# Altium PCB 涂鸦幻彩灯带.PcbDoc_2021-06-10.pcbdoc
Units mil, origin at the board's own origin, x right, y up, seen from the top; angles counter-clockwise.
Board outline 3727 x 3111 mil, 2 copper layers (Top Layer, Bottom Layer); 36 components, 33 nets, 141 pads, 136 vias.
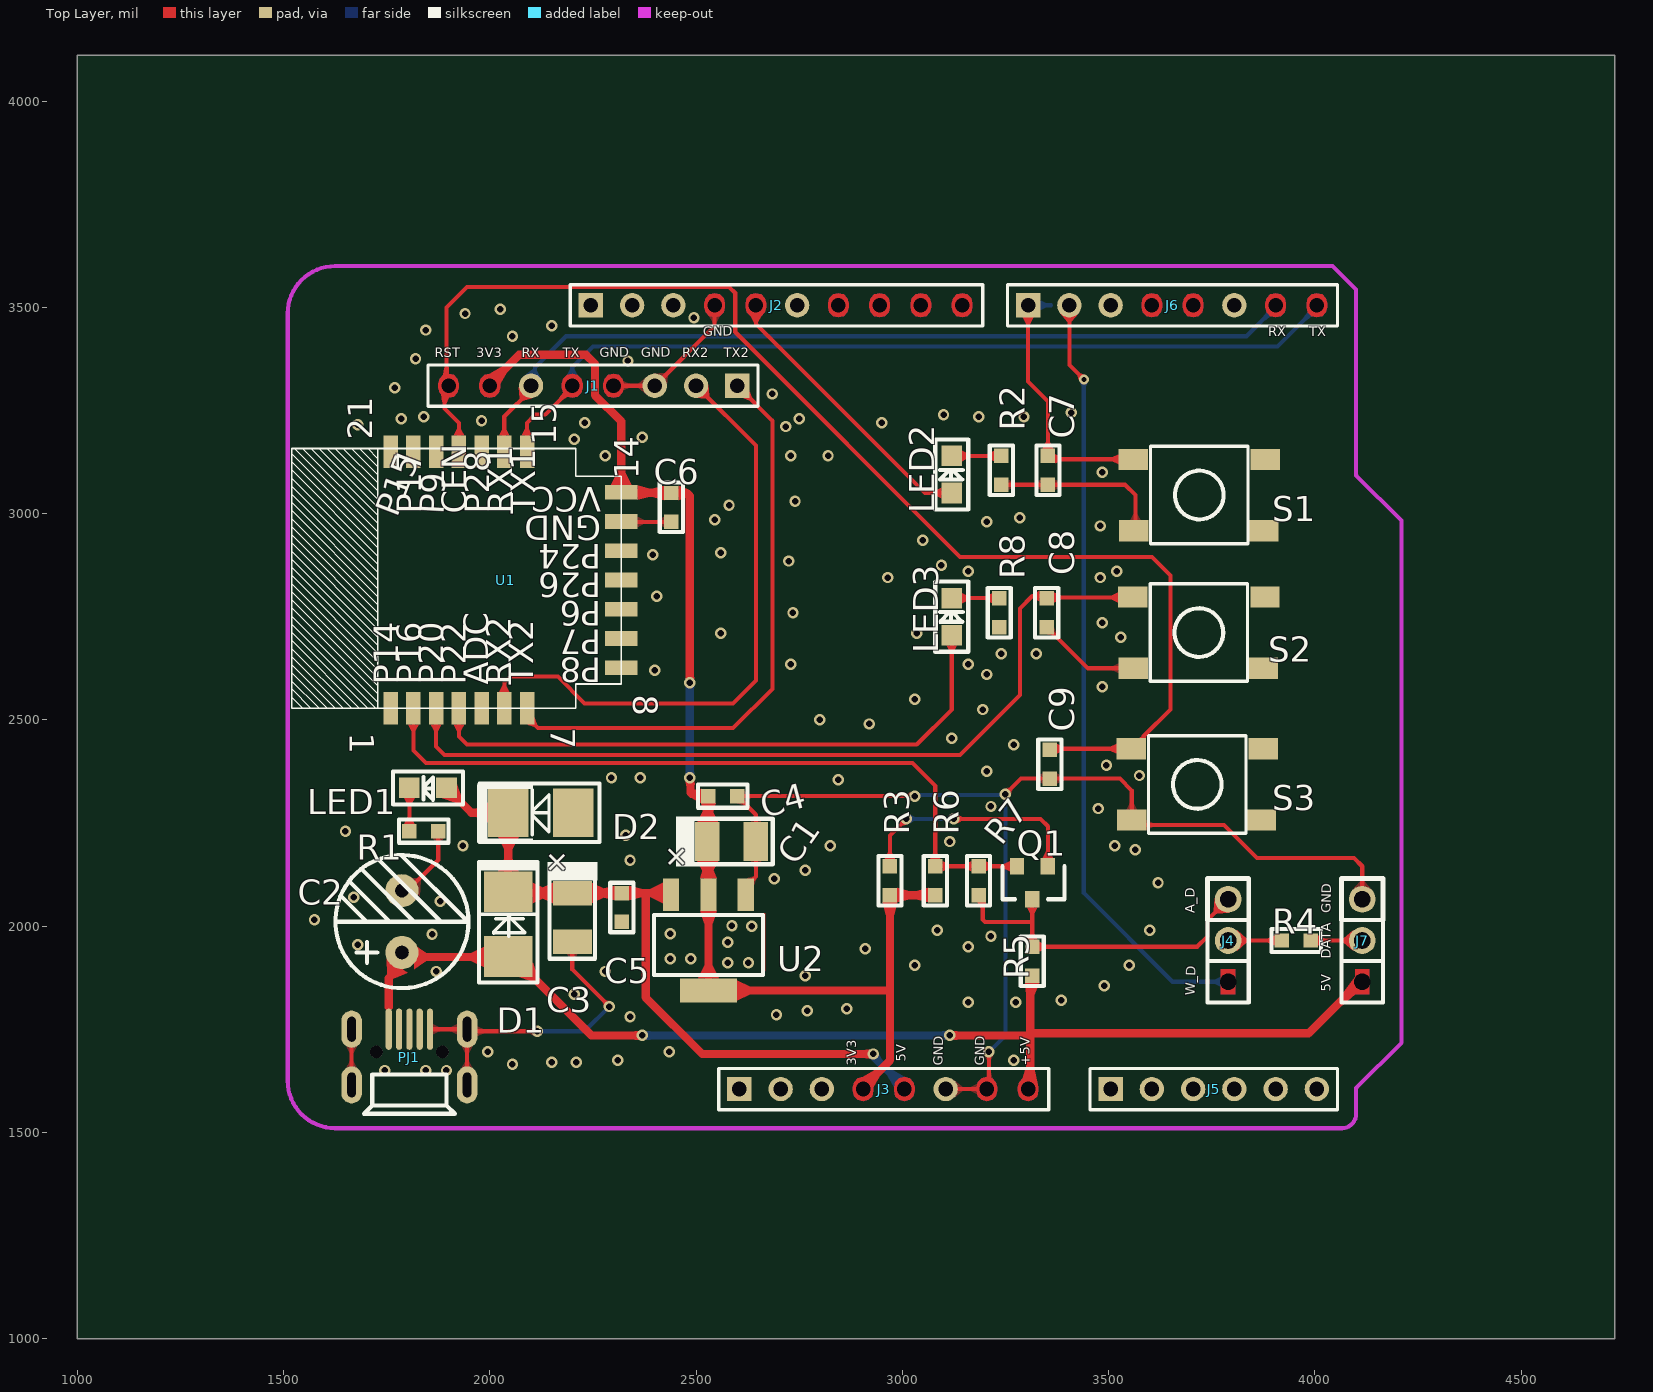
[diagram p0: Top Layer view]
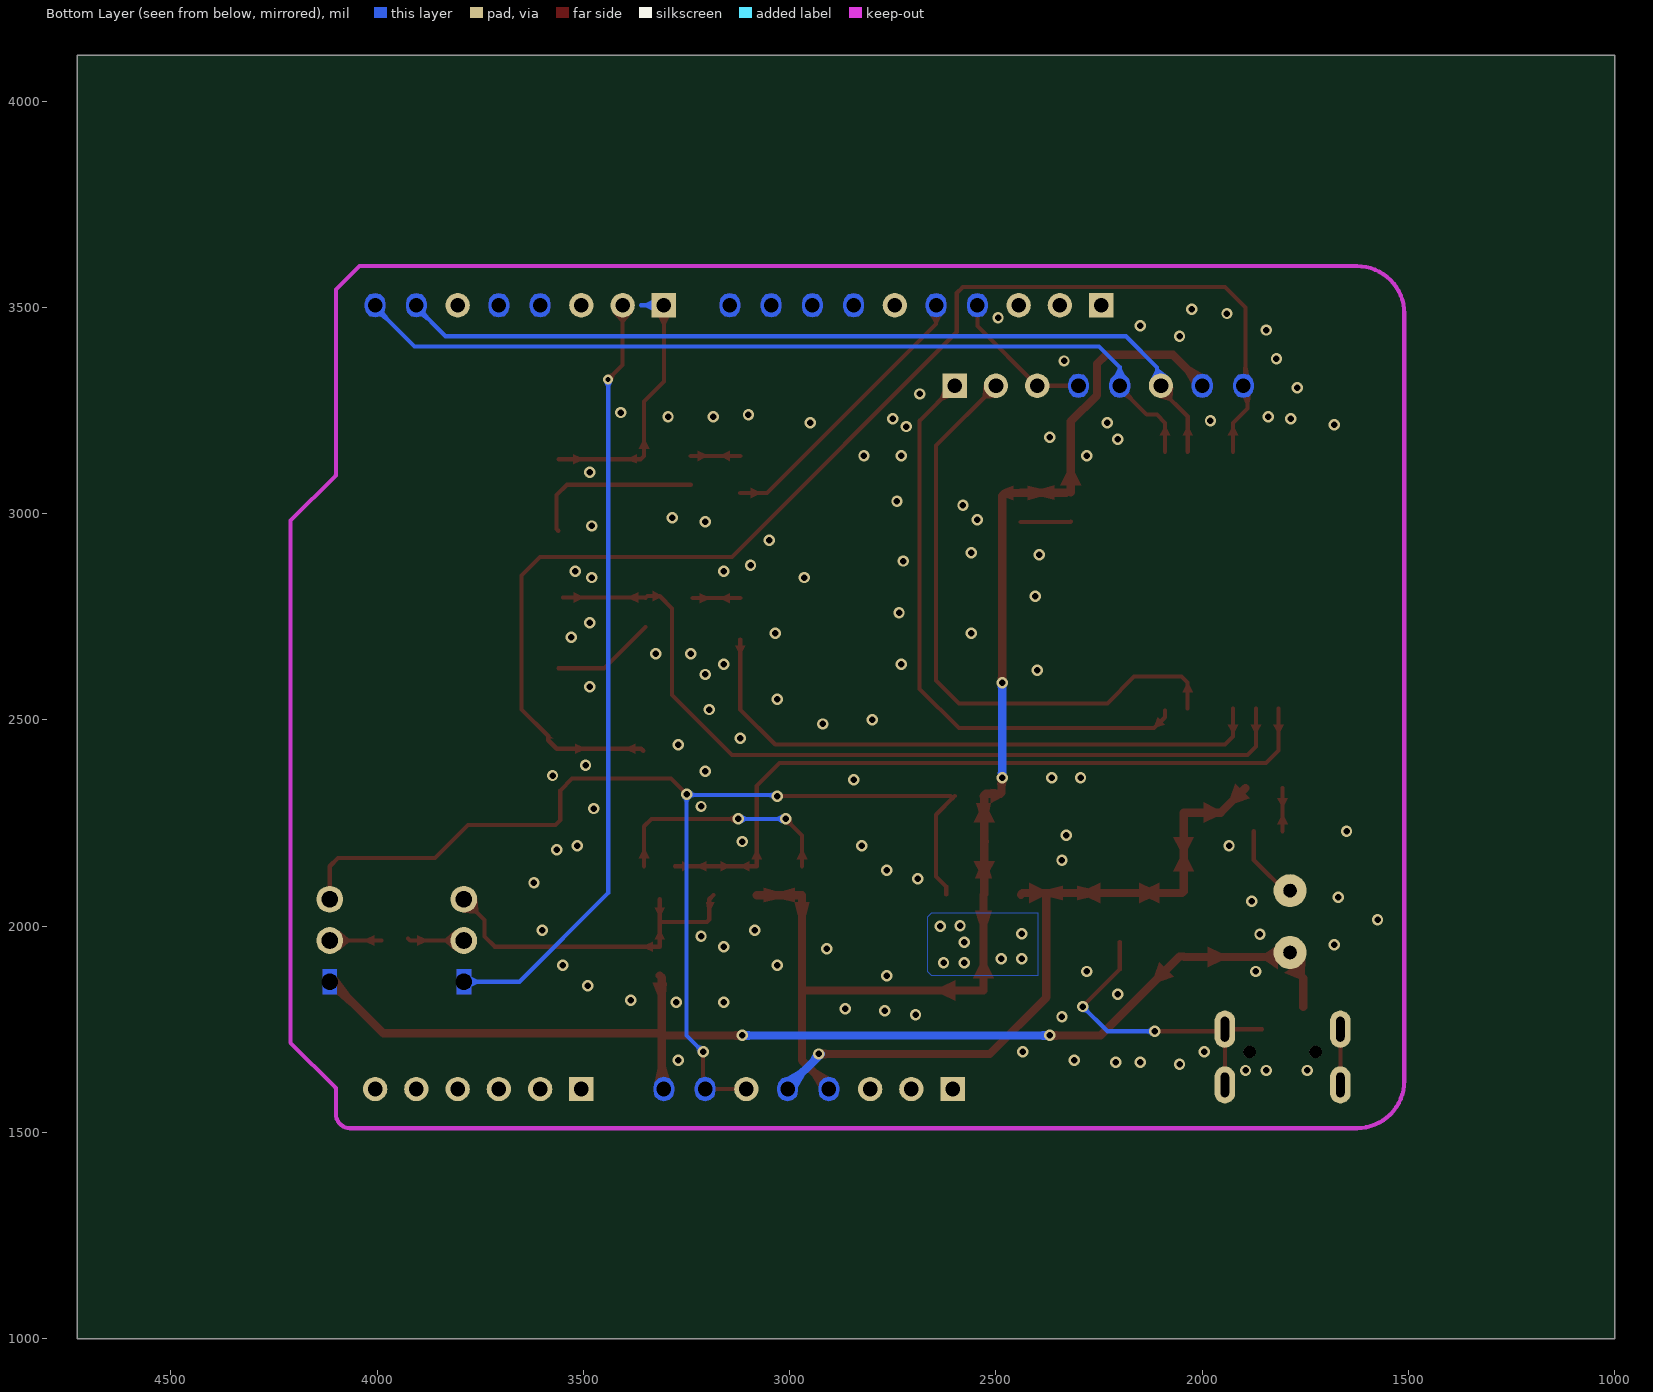
[diagram p1: Bottom Layer view, seen from below]

## Layer stack, top to bottom
Top Layer: signal copper (thickness not stored)
Dielectric: dielectric 12.6, FR-4, Dk 4.8
Bottom Layer: signal copper (thickness not stored)

## Board outline
4727,1000 1000,1000 1000,4111 4727,4111

## Components (designator, comment, footprint, x,y, rotation, side; value= is the part's Value field where it differs from the comment)
C1 "22uF±20%/16V" _____B3528 2585.95,2205 r0 top
C2 "220uF±20%/16V" CD0.15 1787,2011 r90 top
C3 "22uF±20%/16V" _____B3528 2200,2020.94 r270 top
C4 "0.1uF±20%/50V" C0603 2530,2315 r0 top
C5 "0.1uF±20%/50V" C0603 2320,2080 r270 top
C6 "0.1uF±20%/16V" C0603 2440,2980 r90 top
C7 "0.1uF±20%/16V" C0603 3353,3140 r270 top
C8 "0.1uF±20%/16V" C0603 3350,2725 r90 top
C9 "0.1uF±20%/16V" C0603 3357.5,2357.5 r90 top
D1 "SS210" SMA(DO-214AC) 2045,2005 r90 top
D2 "SMBJ05CA" SMB(DO-214AA) 2123.74,2275 r180 top
J1 "CON8" HDR1X8Z 2600,3310 r180 top
J2 "CON10" HDR1X10Z 2245,3505 r0 top
J3 "CON8" HDR1X8Z 2605,1605 r0 top
J4 "KF301-3P" "SIP3 - 2.54" 3790,1865 r90 top
J5 "CON6" HDR1X6Z 3505,1605 r0 top
J6 "CON8" HDR1X8Z 3305,3505 r0 top
J7 "KF301-3P" "SIP3 - 2.54" 4115,1865 r90 top
LED1 "LED" LED0805_1 1895,2335 r180 top
LED2 "LED" LED0805_1 3120,3050 r90 top
LED3 "LED" LED0805_1 3120,2705 r90 top
PJ1 "MCR_USB" MICRO_USB-NEW-16.12.12 1805,1682.5 r180 top
Q1 "S8050" SOT-23-NPN 3353,2145 r180 top
R1 "1R±5%" R0603 1805,2230 r0 top
R2 "1K±5%" R0603 3240,3070 r90 top
R3 "2K±5%" R0603 2970,2075 r90 top
R4 "1R±5%" R0603 3920,1965 r0 top
R5 "2K±5%" R0603 3315,1880 r90 top
R6 "2K±5%" R0603 3080,2075 r90 top
R7 "NC/0R" R0603 3185,2145 r270 top
R8 "1K±5%" R0603 3235,2795 r270 top
S1 "KEY_SW2" KEY4-SMD 3720,3045 r0 top
S2 "KEY_SW2" KEY4-SMD 3718.9,2711.61 r0 top
S3 "KEY_SW2" KEY4-SMD 3714.96,2343.39 r0 top
U1 "WIFI_BLE_CBU" WIFI_BLE_CBU 2318.7,2838.98 r90 top
U2 "GM1117-3.3ST3T" SOT-223 2530,1960 r180 top

## Footprints (in the part's own frame and the unit in brackets; to place one, negate y for a bottom-side part, rotate by r counter-clockwise, add the part's x,y. Pads: shape width x height; smd on the part's side, far side on the other; paste and mask are expansions set on the pad)
_____B3528 [mm]
  rect 1.5x2.4 smd: 1(-1.5,0) 2(1.5,0)
  silkscreen extent -3.4,-1.52 2.54,1.52
C0603 [mil]
  rect 35x35 smd: 1(0,0) 2(70,0)
  silkscreen extent -25,-28 95,28
CD0.15 [mil]
  round 80 hole 32 slot 32.2 at 0 deg: 1(-75,0) 2(75,0)
  silkscreen extent -161,-161 161,161
HDR1X6Z [mm]
  rect 1.5x1.5 hole 0.9: 1(0,0)
  round 1.5 hole 0.9: 2(2.54,0) 3(5.08,0) 4(7.62,0) 5(10.16,0) 6(12.7,0)
  silkscreen extent -1.27,-1.27 13.97,1.27
HDR1X8Z [mm]
  rect 1.5x1.5 hole 0.9: 1(0,0)
  round 1.5 hole 0.9: 2(2.54,0) 3(5.08,0) 6(12.7,0)
  round 0 hole 0.9: 4(7.62,0) 5(10.16,0) 7(15.24,0) 8(17.78,0)
  Top Layer region: 18.415,-0.115 18.33,-0.433 18.097,-0.665 17.78,-0.75 17.462,-0.665 17.23,-0.433 17.145,-0.115 17.145,0.115 17.23,0.432 17.462,0.665 17.78,0.75 18.097,0.665 18.33,0.432 18.415,0.115
  Top Layer region: 15.875,-0.115 15.79,-0.433 15.557,-0.665 15.24,-0.75 14.922,-0.665 14.69,-0.433 14.605,-0.115 14.605,0.115 14.69,0.432 14.922,0.665 15.24,0.75 15.557,0.665 15.79,0.432 15.875,0.115
  Top Layer region: 10.795,-0.115 10.71,-0.433 10.477,-0.665 10.16,-0.75 9.842,-0.665 9.61,-0.433 9.525,-0.115 9.525,0.115 9.61,0.432 9.842,0.665 10.16,0.75 10.477,0.665 10.71,0.432 10.795,0.115
  Top Layer region: 8.255,-0.115 8.17,-0.433 7.937,-0.665 7.62,-0.75 7.302,-0.665 7.07,-0.433 6.985,-0.115 6.985,0.115 7.07,0.432 7.302,0.665 7.62,0.75 7.937,0.665 8.17,0.432 8.255,0.115
  Bottom Layer region: 18.415,-0.115 18.33,-0.433 18.097,-0.665 17.78,-0.75 17.462,-0.665 17.23,-0.433 17.145,-0.115 17.145,0.115 17.23,0.432 17.462,0.665 17.78,0.75 18.097,0.665 18.33,0.432 18.415,0.115
  Bottom Layer region: 15.875,-0.115 15.79,-0.433 15.557,-0.665 15.24,-0.75 14.922,-0.665 14.69,-0.433 14.605,-0.115 14.605,0.115 14.69,0.432 14.922,0.665 15.24,0.75 15.557,0.665 15.79,0.432 15.875,0.115
  Bottom Layer region: 10.795,-0.115 10.71,-0.433 10.477,-0.665 10.16,-0.75 9.842,-0.665 9.61,-0.433 9.525,-0.115 9.525,0.115 9.61,0.432 9.842,0.665 10.16,0.75 10.477,0.665 10.71,0.432 10.795,0.115
  Bottom Layer region: 8.255,-0.115 8.17,-0.433 7.937,-0.665 7.62,-0.75 7.302,-0.665 7.07,-0.433 6.985,-0.115 6.985,0.115 7.07,0.432 7.302,0.665 7.62,0.75 7.937,0.665 8.17,0.432 8.255,0.115
  silkscreen extent -1.27,-1.27 19.05,1.27
HDR1X10Z [mil]
  rect 59.05x59.05 hole 35.43: 1(0,0)
  round 59.05 hole 35.43: 2(100,0) 3(200,0) 6(500,0)
  round 0 hole 35.43: 4(300,0) 5(400,0) 7(600,0) 8(700,0) 9(800,0) 10(900,0)
  Top Layer region: 825,-4.53 821.65,-17.03 812.5,-26.18 800,-29.53 787.5,-26.18 778.35,-17.03 775,-4.53 775,4.53 778.35,17.03 787.5,26.18 800,29.53 812.5,26.18 821.65,17.03 825,4.53
  Top Layer region: 925,-4.53 921.65,-17.03 912.5,-26.18 900,-29.53 887.5,-26.18 878.35,-17.03 875,-4.53 875,4.53 878.35,17.03 887.5,26.18 900,29.53 912.5,26.18 921.65,17.03 925,4.53
  Top Layer region: 725,-4.53 721.65,-17.03 712.5,-26.18 700,-29.53 687.5,-26.18 678.35,-17.03 675,-4.53 675,4.53 678.35,17.03 687.5,26.18 700,29.53 712.5,26.18 721.65,17.03 725,4.53
  Top Layer region: 625,-4.53 621.65,-17.03 612.5,-26.18 600,-29.53 587.5,-26.18 578.35,-17.03 575,-4.53 575,4.53 578.35,17.03 587.5,26.18 600,29.53 612.5,26.18 621.65,17.03 625,4.53
  Top Layer region: 425,-4.53 421.65,-17.03 412.5,-26.18 400,-29.53 387.5,-26.18 378.35,-17.03 375,-4.53 375,4.53 378.35,17.03 387.5,26.18 400,29.53 412.5,26.18 421.65,17.03 425,4.53
  Top Layer region: 325,-4.53 321.65,-17.03 312.5,-26.18 300,-29.53 287.5,-26.18 278.35,-17.03 275,-4.53 275,4.53 278.35,17.03 287.5,26.18 300,29.53 312.5,26.18 321.65,17.03 325,4.53
  Bottom Layer region: 825,-4.53 821.65,-17.03 812.5,-26.18 800,-29.53 787.5,-26.18 778.35,-17.03 775,-4.53 775,4.53 778.35,17.03 787.5,26.18 800,29.53 812.5,26.18 821.65,17.03 825,4.53
  Bottom Layer region: 925,-4.53 921.65,-17.03 912.5,-26.18 900,-29.53 887.5,-26.18 878.35,-17.03 875,-4.53 875,4.53 878.35,17.03 887.5,26.18 900,29.53 912.5,26.18 921.65,17.03 925,4.53
  Bottom Layer region: 725,-4.53 721.65,-17.03 712.5,-26.18 700,-29.53 687.5,-26.18 678.35,-17.03 675,-4.53 675,4.53 678.35,17.03 687.5,26.18 700,29.53 712.5,26.18 721.65,17.03 725,4.53
  Bottom Layer region: 625,-4.53 621.65,-17.03 612.5,-26.18 600,-29.53 587.5,-26.18 578.35,-17.03 575,-4.53 575,4.53 578.35,17.03 587.5,26.18 600,29.53 612.5,26.18 621.65,17.03 625,4.53
  Bottom Layer region: 425,-4.53 421.65,-17.03 412.5,-26.18 400,-29.53 387.5,-26.18 378.35,-17.03 375,-4.53 375,4.53 378.35,17.03 387.5,26.18 400,29.53 412.5,26.18 421.65,17.03 425,4.53
  Bottom Layer region: 325,-4.53 321.65,-17.03 312.5,-26.18 300,-29.53 287.5,-26.18 278.35,-17.03 275,-4.53 275,4.53 278.35,17.03 287.5,26.18 300,29.53 312.5,26.18 321.65,17.03 325,4.53
  silkscreen extent -50,-50 950,50
KEY4-SMD [mm]
  rect 1.8x1.3 smd: 1(-4.035,-2.2) 2(-4.065,2.2) 3(4.065,2.2) 4(3.965,-2.2)
  silkscreen extent -3,-3 3,3
LED0805_1 [mil]
  rect 50x50 smd: 1(0,0) 2(90,0)
  silkscreen extent -40,-40 130,40
MICRO_USB-NEW-16.12.12 [mil]
  oval 15x100 smd: 1(-50,-67.5) 2(-25,-67.5) 3(0,-67.5) 4(25,-67.5) 5(50,-67.5)
  oval 50x90 hole 20 slot 60 at 90 deg: 6(-140,-67.5) 7(-140,67.5) 8(140,67.5) 9(140,-67.5)
  round 30 hole 30 slot 30.2 at 0 deg unplated: ""(-80,-12.5) ""(80,-12.5)
  silkscreen extent -110,42 110,138
R0603 [mil]
  rect 35x35 smd: 1(0,0) 2(70,0)
  silkscreen extent -25,-28 95,28
"SIP3 - 2.54" [mil]
  round 0 hole 39.37 slot 39.57 at 0 deg: 1(0,0)
  round 65 hole 39.37 slot 39.57 at 0 deg: 2(100,0) 3(200,0)
  Top Layer region: 30.03,17.44 -30.03,17.44 -30.03,-17.44 30.03,-17.44
  Bottom Layer region: 30.03,17.44 -30.03,17.44 -30.03,-17.44 30.03,-17.44
  silkscreen extent -50,-50 250,50
SMA(DO-214AC) [mm]
  rect 2.5x3 smd: 1(-2,0) 2(2,0)
  silkscreen extent -3.6,-1.84 3.94,1.83
SMB(DO-214AA) [mm]
  rect 2.5x3 smd: 1(-2,0) 2(2,0)
  silkscreen extent -3.6,-1.8 3.91,1.82
SOT-23-NPN [mil]
  rect 35x40 smd: 1(75,0) 2(0,0) 3(38,80)
  silkscreen extent -40,0 110,80
SOT-223 [mm]
  rect 1x2 smd: 1(-2.3,-2.95) 2(0,-2.95) 3(2.3,-2.95)
  rect 3.5x1.5 smd: 2(0,2.95)
  silkscreen extent -3.35,-1.71 3.35,1.99
WIFI_BLE_CBU [mm]
  rect 2x0.9 smd: 1(-7.9,14.2) 2(-7.9,12.8) 3(-7.9,11.4) 4(-7.9,10) 5(-7.9,8.6) 6(-7.9,7.2) 7(-7.9,5.8) 15(7.9,5.8) 16(7.9,7.2) 17(7.9,8.6) 18(7.9,10) 19(7.9,11.4) 20(7.9,12.8) 21(7.9,14.2)
  rect 0.9x2 smd: 8(-5.4,0) 9(-3.6,0) 10(-1.8,0) 11(0,0) 12(1.8,0) 13(3.6,0) 14(5.4,0)
  silkscreen extent -7.9,0 8.14,20.33

## Via types
v1: diameter 27.56, hole 15.75, Top Layer to Bottom Layer, 135 vias
v2: diameter 24, hole 12, Top Layer to Bottom Layer, 1 vias

## Nets (pads, with @x,y where several pads share a name; then routed paths per layer and width w, separated by ;. In a path a pad name is that pad's centre, name@x,y a point inside that pad or via, vN(x,y) a via of type N, cw(c..) or ccw(c..) an arc to the next point about the centre after c; other vN are vias at no path point)
+3.3V: C1.1 C4.1 C6.2 J1.7 J3.4 R3.1 R6.1 U1.14 U2.2 | length 3070.6
  Top Layer w20: J1.7 2000,3314.53 2070.47,3385 2233.28,3385 2255,3363.28 2255,3286.83 2318.7,3223.13 U1.14 ; U1.14@2330.32,3050.79 2439.21,3050.79 C6.2 2477.5,3050 2485,3042.5 v1(2485,2590) ; v1(2485,2360) 2486.45,2358.55 2486.45,2323.55 2488.89,2321.11 2523.89,2321.11 C4.1 2528.45,2313.45 2528.45,2206.55 C1.1 2528.45,2203.45 2528.45,2077.7 2530,2076.14 2530,1843.86 2966.14,1843.86 2970,1840 ; J3.4 2905,1609.53 2970,1674.53 2970,1840 ; R6.1 R3.1 2970,1840
  Bottom Layer w20: v1@2485,2372.22 v1(2485,2590)
  other v1: 2577,1911 2627,1911 2437,1921 2487,1921 2577,1961 2437,1981 2635,2000 2587,2001
+5V: C2.1 D1.1 J3.8 J7.1 PJ1.5 R5.1 | length 2871.2
  Top Layer w20: 1755,1803.96 1755,1873.76 1790,1908.76 1790,1925 2043.74,1925 D1.1 2054.84,1926.26 2246.1,1735 v1(2370,1735) ; v1(3115,1735) 3310,1735 ; J3.8 3310,1610 3310,1735 ; R5.1 3310,1875 3310,1740 ; J7.1 4110,1865 3985,1740 3310,1740 ; 3310,1735 3310,1740
  Bottom Layer w20: v1(2370,1735) v1(3115,1735)
+5VF: C3.1 C5.1 D1.2 D2.2 J3.5 LED1.1 U2.3 | length 1743.9
  Top Layer w20: LED1.1 1955,2275 D2.2 D1.2 2048.74,2080 C3.1 C5.1 2377.79,2080 ; U2.3 2435.59,2080 2377.79,2080 ; v1(2930,1690) 2515,1690 2377.79,1827.2 2377.79,2080
  Bottom Layer w20: v1@2924.53,1690 3005,1609.53 J3.5
ADC: U1.5
GND: C1.2 C2.2 C3.2 C4.2 C5.2 C6.1 C7.2 C8.1 C9.1 D2.1 J1.3 J1.4 J2.4 J3.6 J3.7 J7.3 PJ1.1 PJ1.6 PJ1.7 PJ1.8 PJ1.9 R1.2 R2.1 R8.2 S1.1 S2.1 S3.1 U1.13 U2.1 | length 5116.3
  Top Layer w10: PJ1.8 PJ1.9 ; C2.2@1790,2075 1875,2160 R1.2 ; PJ1.1 PJ1.6 ; PJ1.7 PJ1.6 ; v1(2115,1745) 1950,1745 PJ1.6 ; C3.2 2200,1895 v1(2290,1805) ; J1.4 J1.3 2545,3455 J2.4 ; U1.13 2319.41,2980 C6.1 ; U2.1 2620.55,2095.83 2645,2120.28 C1.2 2645,2270 C4.2 2605,2310 2610,2315 v1(3030,2315) ; J3.6 J3.7 3210,1610 v1(3210,1695) ; R2.1 C7.2 3540,3070 3565,3045 3565,2962.24 S1.1 ; v1(3250,2320) 3287.5,2357.5 C9.1 3527.5,2357.5 3556.1,2328.9 S3.1 3567.87,2245 3780,2245 3860,2165 4095,2165 4115,2145 J7.3 ; C8.1 3450,2625 S2.1
  Bottom Layer w10: v1(2115,1745) 2230,1745 v1(2290,1805) ; v1(3030,2315) 3032.5,2317.5 3247.5,2317.5 v1(3250,2320) 3250,1735 v1(3210,1695)
  other v1: 1745,1650 1845,1650 1895,1650 2055,1665 2150,1670 2210,1670 2310,1675 3270,1675 1995,1695 2435,1695 2340,1780 2695,1785 2770,1795 2865,1800 3160,1815 3275,1815 3385,1820 3490,1855 2765,1880 1870,1890 3030,1905 3550,1905 2910,1945 3160,1950 1680,1955 3215,1975 1860,1980 3085,1990 3600,1990 1575,2015 1880,2060 1670,2070 3620,2105 2690,2115 2765,2135 2340,2160 3565,2185 1935,2195 2825,2195 3515,2195 3115,2205 2330,2220 1650,2230 3475,2285 3215,2290 2845,2355 2295,2360 2365,2360 3575,2365 3205,2375 3495,2390 3270,2440 3120,2455 2920,2490 2800,2500 3195,2525 3030,2550 3485,2580 3205,2610 2400,2620 2730,2635 3160,2635 3240,2660 3325,2660 3530,2700 2560,2710 3035,2710 3485,2735 2735,2760 2405,2800 2965,2845 3480,2845 3160,2860 3520,2860 3095,2875 2725,2885 2395,2900 2560,2905 3050,2935 3480,2970 3205,2980 2545,2985 3285,2990 2580,3020 2740,3030 3485,3100 2280,3140 2730,3140 2820,3140 2205,3180 2370,3185 2717,3211 1680,3215 2230,3220 2950,3220 1980,3225 1785,3230 2750,3230 1840,3235 3185,3235 3295,3235 3100,3240 3410,3245 2685,3290 1770,3305 2335,3370 1820,3375 2055,3430 1845,3445 2150,3455 2495,3475 1940,3485 2025,3495
NETC7_1: C7.1 J6.1 S1.2 | length 650.8
  Top Layer w10: J6.1 3305,3320 3353,3272 C7.1 3361.39,3131.61 S1.2
  Bottom Layer w10: J6.1 3360.47,3505
NETJ2_5: J2.5 LED2.1 | length 689.8
  Top Layer w10: J2.5 2645,3460 3055,3050 LED2.1
NETJ7_2: J7.2 R4.2 | length 125
  Top Layer w10: R4.2 J7.2
NETLED1_2: LED1.2 R1.1 | length 105
  Top Layer w10: R1.1 LED1.2
NETLED2_2: LED2.2 R2.2 | length 120
  Top Layer w10: LED2.2 R2.2
NETLED3_2: LED3.2 R8.1 | length 115
  Top Layer w10: LED3.2 R8.1
NETQ1_2: Q1.2 R3.2 | length 579
  Top Layer w10: R3.2 2970,2220 v1(3010,2260) ; v1(3125,2260) 3335,2260 3353,2242 Q1.2
  Bottom Layer w10: v1(3010,2260) v1(3125,2260)
OUT_DATA: Q1.1 R6.2 R7.1 U1.2 | length 1796.3
  Top Layer w10: U1.2 1814.76,2425.24 1845,2395 3025,2395 3080,2340 R6.2 R7.1 Q1.1
OUT_RGB: J4.2 R4.1 | length 137.1
  Top Layer w10: J4.2 R4.1 R4.1@3925,1970
OUT_RGB_ARD: J4.1 J6.2 | length 1892.7
  Top Layer w10: J6.2@3400,3510 J6.2 3405,3360 v2(3440,3325)
  Bottom Layer w10: J6.2 J6.2@3410,3510 ; v2(3440,3325) 3440,2080 3655,1865 J4.1
OUT_RGB_CBU: J4.3 Q1.3 R5.2 R7.2 | length 847.8
  Top Layer w10: R7.2 3195,2065 3195,2015.86 3200.86,2010 3312.5,2010 3315,2007.5 ; Q1.3 3315,2007.5 ; J4.3 3740,2015 3740,1975 3715,1950 R5.2 3315,2007.5
P6: U1.10
P6_KEY1: C8.2 S2.2 U1.3 | length 2059.4
  Top Layer w10: U1.3 1869.88,2435.12 1890,2415 3140,2415 3285,2560 3285,2770 3315,2800 C8.2@3345,2800 ; C8.2 3351.61,2796.61 S2.2@3549.96,2796.61
P7: U1.9
P8: U1.8
P9: U1.19
P14: U1.1
P15: U1.21
P17: U1.20
P22: LED3.1 U1.4 | length 1476.4
  Top Layer w10: U1.4 1925,2460 1945,2440 3035,2440 3120,2525 LED3.1@3120,2695
P24: U1.12
P26: U1.11
P28: U1.17
RST: C9.2 J1.8 S3.2 U1.18 | length 3158.7
  Top Layer w10: U1.18 1925,3220 1890,3255 1890,3300 J1.8 1895,3315 1895,3500 1944.53,3549.53 2580.39,3549.53 2595,3534.91 2595,3440 3140,2895 3605,2895 3650,2850 3650,2525.08 3585.35,2460.43 3585.35,2450.59 3564.76,2430 S3.2 3360,2430 C9.2 C9.2@3355,2425
RX2: J1.2 U1.6 | length 1502.9
  Top Layer w10: U1.6 2035.24,2590.24 2050,2605 2165,2605 2230,2540 2590,2540 2645,2595 2645,3165 J1.2
TX2: J1.1 U1.7 | length 1431.6
  Top Layer w10: U1.7@2090.35,2522.84 2090.35,2506.3 2116.65,2480 2590,2480 2685,2575 2685,3225 J1.1
WRX: J1.6 J6.7 U1.16 | length 2100.5
  Top Layer w10: U1.16 2035,3150.24 2035,3235 2100,3300 J1.6 ; J6.7 3905,3509.53
  Bottom Layer w10: J1.6 2109.39,3319.39 2109.39,3354.39 2185,3430 3834.53,3430 3905,3500.47 J6.7
WTX: J1.5 J6.8 U1.15 | length 2154.9
  Top Layer w10: U1.15 2090,3150.35 2090,3220 2110,3240 2134.53,3240 2200,3305.47 J1.5
  Bottom Layer w10: 2200,3290 J1.5 2200,3355 2250,3405 3909.53,3405 4005,3500.47 J6.8
pads on no net: J2.1 J2.2 J2.3 J2.6 J2.7 J2.8 J2.9 J2.10 J3.1 J3.2 J3.3 J5.1 J5.2 J5.3 J5.4 J5.5 J5.6 J6.3 J6.4 J6.5 J6.6 PJ1. PJ1.2 PJ1.3 PJ1.4 S1.3 S1.4 S2.3 S2.4 S3.3 S3.4
copper on no net:
  other v1: 2205,1835 2280,1890

## Polygon pours and split planes (outlines as drawn)
+3.3V on Bottom Layer (solid): 2397,2031 2657,2031 2667,2021 2667,1891 2657,1881 2397,1881 2397,2021
GND on Bottom Layer (solid): 1607,3611 4037,3611 4047,3601 4107,3541 4107,3091 4117,3091 4217,2991 4217,1711 4197,1711 4097,1611 4097,1531 4077,1511 1597,1511 1587,1521 1507,1601 1507,3541 1517,3551
+3.3V on Top Layer (solid): 2407,2031 2667,2031 2667,1891 2657,1881 2397,1881 2397,2021
GND on Top Layer (solid): 1507,1591 1507,3501 1507,3531 1547,3571 1577,3571 1617,3611 1607,3611 1527,3611 1607,3611 1617,3611 4037,3611 4107,3541 4107,3081 4137,3081 4217,3001 4217,1741 4227,1731 4227,1721 4107,1601 4107,1531 4077,1501 1617,1501 1607,1511 1577,1511 1527,1561 1527,1571 1507,1591

## Keep-outs
Keep-Out Layer:
  lines w10: 1510.02,1624.97 ccw(c1625,1625) 1625,1510.02 ; 1510.01,3485.06 ccw(c1515.03,3485.05) 1510.02,3485 cw(c1625,3485) 1624.79,3599.98 cw(c1625,3485) 1625,3599.98 ; 4065.61,1510.01 ccw(c4065.6,1515.03) 4065.63,1510.02 ccw(c4065.63,1544.37) 4099.99,1544.34 ccw(c4094.97,1544.4) 4099.99,1544.39 ; 4099.98,1605 cw(c4105,1605) 4101.47,1608.56 ; 4099.98,3095 ccw(c4105,3095) 4101.47,3091.44 ; 1510.02,1625.02 ccw(c1515.03,1625.03) 1510.02,1625

## Other copper
Top Layer:
  region net WTX: 2187.5,3283.82 2178.35,3292.97 2168.78,3281.33 2175.85,3274.25
  region net +3.3V: 2000,3339.53 2025,3314.53 2040.78,3341.17 2026.64,3355.31
  region net RST: 1887.5,3336.18 1900,3339.53 1900,3355.06 1890,3352.38
  region net RST: 1900,3280.47 1881.8,3289.52 1885,3271.18 1895,3266.21
  region net NETJ2_5: 2657.5,3478.82 2632.5,3478.82 2640,3463.82 2650,3463.82
  region net +3.3V: 2905,1634.53 2930,1609.53 2945.78,1636.17 2931.64,1650.31
  region net +5V: 3292.5,1631.18 3326.65,1622.03 3320,1654.87 3300,1660.23
  region net +5V: 4097.56,1877.56 4097.56,1834.97 4067.56,1808.42 4067.56,1836.7
  region net +3.3V: 2553.45,2157.76 2503.45,2157.76 2518.45,2127.76 2538.45,2127.76
  region net +3.3V: 2503.45,2252.24 2553.45,2252.24 2538.45,2282.24 2518.45,2282.24
  region net +5VF: 2247.24,2105 2247.24,2055 2277.24,2070 2277.24,2090
  region net +5VF: 2152.76,2055 2152.76,2105 2122.76,2090 2122.76,2070
  region net +3.3V: 2547.5,2297.5 2512.5,2297.5 2518.45,2267.5 2538.45,2267.5
  region net +3.3V: 2512.5,2297.5 2512.5,2332.5 2488.89,2331.11 2488.89,2311.11
  region net +5VF: 2337.5,2097.5 2337.5,2062.5 2367.5,2070 2367.5,2090
  region net +5VF: 2302.5,2062.5 2302.5,2097.5 2272.5,2090 2272.5,2070
  region net +3.3V: 2422.5,3032.5 2422.5,3067.5 2392.5,3060.79 2392.5,3040.79
  region net +3.3V: 2457.5,3067.5 2457.5,3032.5 2477.5,3040 2477.5,3060
  region net NETC7_1: 3340.5,3157.5 3365.5,3157.5 3358,3172.5 3348,3172.5
  region net NETC7_1: 3370.5,3144.11 3370.5,3122.5 3385.5,3126.61 3385.5,3136.61
  region net P6_KEY1: 3332.5,2787.5 3332.5,2812.5 3317.5,2805 3317.5,2795
  region net P6_KEY1: 3367.5,2809.11 3367.5,2784.11 3382.5,2791.61 3382.5,2801.61
  region net RST: 3375,2442.5 3375,2417.5 3390,2425 3390,2435
  region net +5V: 2104.06,1912.4 2068.7,1877.05 2100.52,1866.44 2114.66,1880.58
  region net +5V: 1985.94,1900 1985.94,1950 1955.94,1935 1955.94,1915
  region net +5VF: 2104.06,2105 2104.06,2055 2134.06,2070 2134.06,2090
  region net +5VF: 2020,2132.95 2070,2132.95 2055,2162.95 2035,2162.95
  region net +5VF: 2070,2215.95 2020,2215.95 2035,2185.95 2055,2185.95
  region net +5VF: 1995.79,2250 1995.79,2300 1965.79,2285 1965.79,2265
  region net TX2: 2629.53,3298.15 2611.85,3280.47 2627.76,3275.17 2634.83,3282.24
  region net NETC7_1: 3317.5,3475.47 3292.5,3475.47 3300,3460.47 3310,3460.47
  region net +5VF: 1920,2345.36 1884.64,2310 1916.46,2299.39 1930.61,2313.54
  region net NETLED1_2: 1817.5,2310 1792.5,2310 1800,2295 1810,2295
  region net NETJ2_5: 3095,3037.5 3095,3062.5 3080,3055 3080,3045
  region net NETLED2_2: 3145,3152.5 3145,3127.5 3160,3135 3160,3145
  region net P22: 3132.5,2680 3107.5,2680 3115,2665 3125,2665
  region net NETLED3_2: 3145,2807.5 3145,2782.5 3160,2790 3160,2800
  region net OUT_RGB_CBU: 3327.5,2045 3302.5,2045 3310,2030 3320,2030
  region net NETQ1_2: 3340.5,2165 3365.5,2165 3358,2180 3348,2180
  region net OUT_DATA: 3260.5,2132.5 3260.5,2157.5 3245.5,2150 3245.5,2140
  region net NETLED1_2: 1792.5,2247.5 1817.5,2247.5 1810,2262.5 1800,2262.5
  region net NETLED2_2: 3222.5,3127.5 3222.5,3152.5 3207.5,3145 3207.5,3135
  region net +3.3V: 2987.5,2092.5 2987.5,2057.5 3017.5,2065 3017.5,2085
  region net +3.3V: 2987.5,2057.5 2952.5,2057.5 2960,2027.5 2980,2027.5
  region net NETQ1_2: 2957.5,2162.5 2982.5,2162.5 2975,2177.5 2965,2177.5
  region net OUT_RGB: 3902.5,1952.5 3902.5,1977.5 3887.5,1970 3887.5,1960
  region net NETJ7_2: 4007.5,1977.5 4007.5,1952.5 4022.5,1960 4022.5,1970
  region net +5V: 3332.5,1862.5 3297.5,1862.5 3300,1832.5 3320,1832.5
  region net OUT_RGB_CBU: 3332.5,1962.5 3332.5,1937.5 3347.5,1945 3347.5,1955
  region net OUT_RGB_CBU: 3302.5,1967.5 3327.5,1967.5 3320,1982.5 3310,1982.5
  region net +3.3V: 3062.5,2057.5 3062.5,2092.5 3032.5,2085 3032.5,2065
  region net OUT_DATA: 3097.5,2157.5 3097.5,2132.5 3112.5,2140 3112.5,2150
  region net OUT_DATA: 3067.5,2162.5 3092.5,2162.5 3085,2177.5 3075,2177.5
  region net OUT_DATA: 3202.5,2157.5 3202.5,2132.5 3217.5,2140 3217.5,2150
  region net OUT_DATA: 3167.5,2132.5 3167.5,2157.5 3152.5,2150 3152.5,2140
  region net OUT_RGB_CBU: 3202.5,2057.5 3182.5,2057.5 3190,2042.5 3200,2042.5
  region net NETLED3_2: 3217.5,2782.5 3217.5,2807.5 3202.5,2800 3202.5,2790
  region net NETC7_1: 3524.53,3119.11 3524.53,3144.11 3509.53,3136.61 3509.53,3126.61
  region net P6_KEY1: 3523.43,2784.11 3523.43,2809.11 3508.43,2801.61 3508.43,2791.61
  region net RST: 3519.49,2417.5 3519.49,2442.5 3504.49,2435 3504.49,2425
  region net RST: 3572.85,2455.59 3590.35,2455.59 3590.35,2460.43 3580.35,2460.43
  region net +3.3V: 2598.9,1868.86 2598.9,1818.86 2628.9,1833.86 2628.9,1853.86
  region net +3.3V: 2505,1873.39 2555,1873.39 2540,1903.39 2520,1903.39
  region net +3.3V: 2549.68,2036.77 2510.32,2036.77 2520,2006.77 2540,2006.77
  region net +3.3V: 2510.32,2115.51 2549.68,2115.51 2538.45,2145.51 2518.45,2145.51
  region net +5VF: 2419.76,2055 2419.76,2105 2389.76,2090 2389.76,2070
  region net +3.3V: 2358.07,3069.29 2358.07,3033.85 2388.07,3040.79 2388.07,3060.79
  region net +3.3V: 2293.7,3069.29 2343.7,3069.29 2328.7,3099.29 2308.7,3099.29
  region net WTX: 2077.5,3189.37 2102.5,3189.37 2095,3204.37 2085,3204.37
  region net WRX: 2022.5,3189.37 2047.5,3189.37 2040,3204.37 2030,3204.37
  region net RST: 1912.5,3189.37 1937.5,3189.37 1930,3204.37 1920,3204.37
  region net TX2: 2108.07,2506.27 2090.41,2488.58 2106.31,2483.28 2113.37,2490.35
  region net RX2: 2022.74,2567.32 2047.74,2567.32 2040.24,2582.32 2030.24,2582.32
  region net P22: 1937.5,2488.58 1912.5,2488.58 1920,2473.58 1930,2473.58
  region net P6_KEY1: 1882.38,2488.58 1857.38,2488.58 1864.88,2473.58 1874.88,2473.58
  region net OUT_DATA: 1827.26,2488.58 1802.26,2488.58 1809.76,2473.58 1819.76,2473.58
  region net OUT_RGB_ARD: 3440.75,3336.98 3428.02,3324.25 3424.91,3333.02 3431.98,3340.09
  region net +3.3V: 2495.33,2599.11 2474.67,2599.11 2475,2608.76 2495,2608.76
  region net +3.3V: 2496.01,2351.71 2475.4,2350.12 2476.45,2340.52 2496.45,2342.07
  region net +5VF: 2920.89,1679.67 2920.89,1700.33 2911.24,1700 2911.24,1680
  region net +5V: 2360.89,1724.67 2360.89,1745.33 2351.24,1745 2351.24,1725
  region net +5V: 3124.11,1724.67 3124.11,1745.33 3133.76,1745 3133.76,1725
  region net NETQ1_2: 3010.86,2246.25 2996.25,2260.86 2993.2,2250.27 3000.27,2243.2
  region net NETQ1_2: 3134.11,2249.67 3134.11,2270.33 3143.76,2265 3143.76,2255
  region net +5V: 1816.46,1895 1816.46,1955 1844.46,1935 1844.46,1915
  region net +5V: 1800.86,1886.5 1750.45,1919.03 1751.88,1884.79 1769.07,1873.69
  region net RX2: 2498.15,3280.53 2529.47,3311.85 2531.96,3285.11 2524.89,3278.04
  region net WRX: 2107,3281.32 2070.66,3306.64 2072.85,3279.92 2081.18,3274.11
  region net OUT_RGB_CBU: 3757.56,2067.04 3792.04,2032.56 3762.25,2030.18 3755.18,2037.25
  region net OUT_RGB: 3811.5,1940.62 3811.5,1989.37 3834.25,1970 3834.25,1960
  region net OUT_RGB_ARD: 3427.15,3485.47 3382.85,3485.47 3400,3464.8 3410,3464.8
  region net NETJ7_2: 4093.5,1940.62 4093.5,1989.37 4070.75,1970 4070.75,1960
Bottom Layer:
  region net WTX: 2187.5,3336.18 2212.5,3336.18 2205,3351.18 2195,3351.18
  region net +5VF: 2980,1609.53 3005,1634.53 2978.36,1650.31 2964.22,1636.17
  region net OUT_RGB_ARD: 3772.56,1877.5 3772.56,1852.5 3757.56,1860 3757.56,1870
  region net WRX: 3892.5,3478.82 3883.35,3487.97 3873.78,3476.33 3880.85,3469.25
  region net WTX: 3992.5,3478.82 3983.35,3487.97 3973.78,3476.33 3980.85,3469.25
  region net NETC7_1: 3334.53,3517.5 3334.53,3492.5 3349.53,3500 3349.53,3510
  region net OUT_RGB_ARD: 3431,3317.06 3449,3317.06 3445,3308.66 3435,3308.66
  region net +3.3V: 2495.33,2580.89 2474.67,2580.89 2475,2571.24 2495,2571.24
  region net +3.3V: 2495.33,2369.11 2474.67,2369.11 2475,2378.76 2495,2378.76
  region net +5VF: 2926.32,1676.72 2943.63,1688.01 2948.81,1679.86 2931.68,1668.7
  region net +5V: 2379.11,1724.67 2379.11,1745.33 2388.76,1745 2388.76,1725
  region net +5V: 3105.89,1724.67 3105.89,1745.33 3096.24,1745 3096.24,1725
  region net NETQ1_2: 3019.11,2249.67 3019.11,2270.33 3028.76,2265 3028.76,2255
  region net NETQ1_2: 3115.89,2249.67 3115.89,2270.33 3106.24,2265 3106.24,2255
  region net WRX: 2083.03,3334.16 2126.09,3323.82 2114.39,3347.89 2104.39,3350.29

## Silkscreen, mask and mechanical layers (free items; w line width, h text height)
Top Overlay:
  text "GND" at 2517,3421 h39.37 r1
  text "RX" at 3887,3421 h39.37
  text "TX" at 3987,3421 h39.37
  text "RST" at 1867,3371 h39.37
  text "3V3" at 1967,3371 h39.37
  text "RX" at 2077,3371 h39.37
  text "TX" at 2177,3371 h39.37
  text "GND" at 2267,3371 h39.37 r1
  text "GND" at 2367,3371 h39.37 r1
  text "RX2" at 2467,3371 h39.37
  text "TX2" at 2567,3371 h39.37
  text "A_D" at 3717,2031 h39.37 r90
  text "GND" at 4047,2031 h39.37 r89
  text "DATA" at 4047,1921 h39.37 r90
  text "5V" at 4047,1841 h39.37 r90
  text "W_D" at 3717,1831 h39.37 r88
  text "5V" at 3017,1671 h39.37 r90
  text "3V3" at 2897,1661 h39.37 r90
  text "GND" at 3107,1661 h39.37 r89
  text "GND" at 3207,1661 h39.37 r89
  text "+5V" at 3317,1661 h39.37 r90
Document:
  lines w10: 1505,3485 cw(c1625,3485) 1625,3605 ; 1505,3495 1505,1625 ccw(c1625,1625) 1625,1505 4065.63,1505 ccw(c4065.63,1544.37) 4105,1544.37 4105,1605 4214.38,1714.38 4215,1715 4215,2985 4105,3095 4105,3545 4045,3605 1615,3605

## Text inside footprints (layer, text, board x,y; h text height)
C1: Top Overlay "+" at 2410.54,2174.12 h59.06 r315
C3: Top Overlay "+" at 2169.12,2196.35 h59.06 r225
U1: Top Overlay "P15" at 1775.74,2988.46 h59.06 r69; Top Overlay "P17" at 1833.56,2999.04 h59.06 r90; Top Overlay "P9" at 1888.12,2997.49 h59.06 r87; Top Overlay "CEN" at 1943.39,2999.04 h59.06 r90; Top Overlay "P28" at 1998.61,2999.04 h59.06 r90; Top Overlay "RX1" at 2054.48,2999.04 h59.06 r90; Top Overlay "TX1" at 2109.7,2999.04 h59.06 r90; Top Overlay "GND" at 2269.7,2994.98 h59.06 r180; Top Overlay "VCC" at 2269.64,3063.98 h59.06 r180; Top Overlay "TX2" at 2105.7,2584.98 h59.06 r90; Top Overlay "RX2" at 2050.65,2584.98 h59.06 r90; Top Overlay "ADC" at 1996.23,2584.98 h59.06 r90; Top Overlay "P22" at 1941.81,2584.98 h59.06 r90; Top Overlay "P20" at 1887.39,2584.98 h59.06 r90; Top Overlay "P16" at 1833.6,2584.98 h59.06 r90; Top Overlay "P14" at 1778.55,2584.98 h59.06 r90; Top Overlay "21" at 1714.7,3178.98 h59.06 r90; Top Overlay "1" at 1660.43,2468.9 h59.06 r270; Top Overlay "P24" at 2269.7,2925.35 h59.06 r180; Top Overlay "P26" at 2269.7,2856.35 h59.06 r180; Top Overlay "P6" at 2269.7,2787.52 h59.06 r180; Top Overlay "P7" at 2269.7,2718.98 h59.06 r180; Top Overlay "P8" at 2269.7,2649.98 h59.06 r180; Top Overlay "7" at 2147.47,2481 h59.06 r270; Top Overlay "8" at 2347.47,2561 h59.06 r270; Top Overlay "14" at 2360.7,3082.98 h59.06 r90; Top Overlay "15" at 2160.7,3165.98 h59.06 r90